# Altium PCB pcb.PcbDoc
Units mm, origin at the board's own origin, x right, y up, seen from the top; angles counter-clockwise.
Board outline 69.89 x 60 mm, 2 copper layers (Top Layer, Bottom Layer); 47 components, 49 nets, 205 pads, 70 vias.
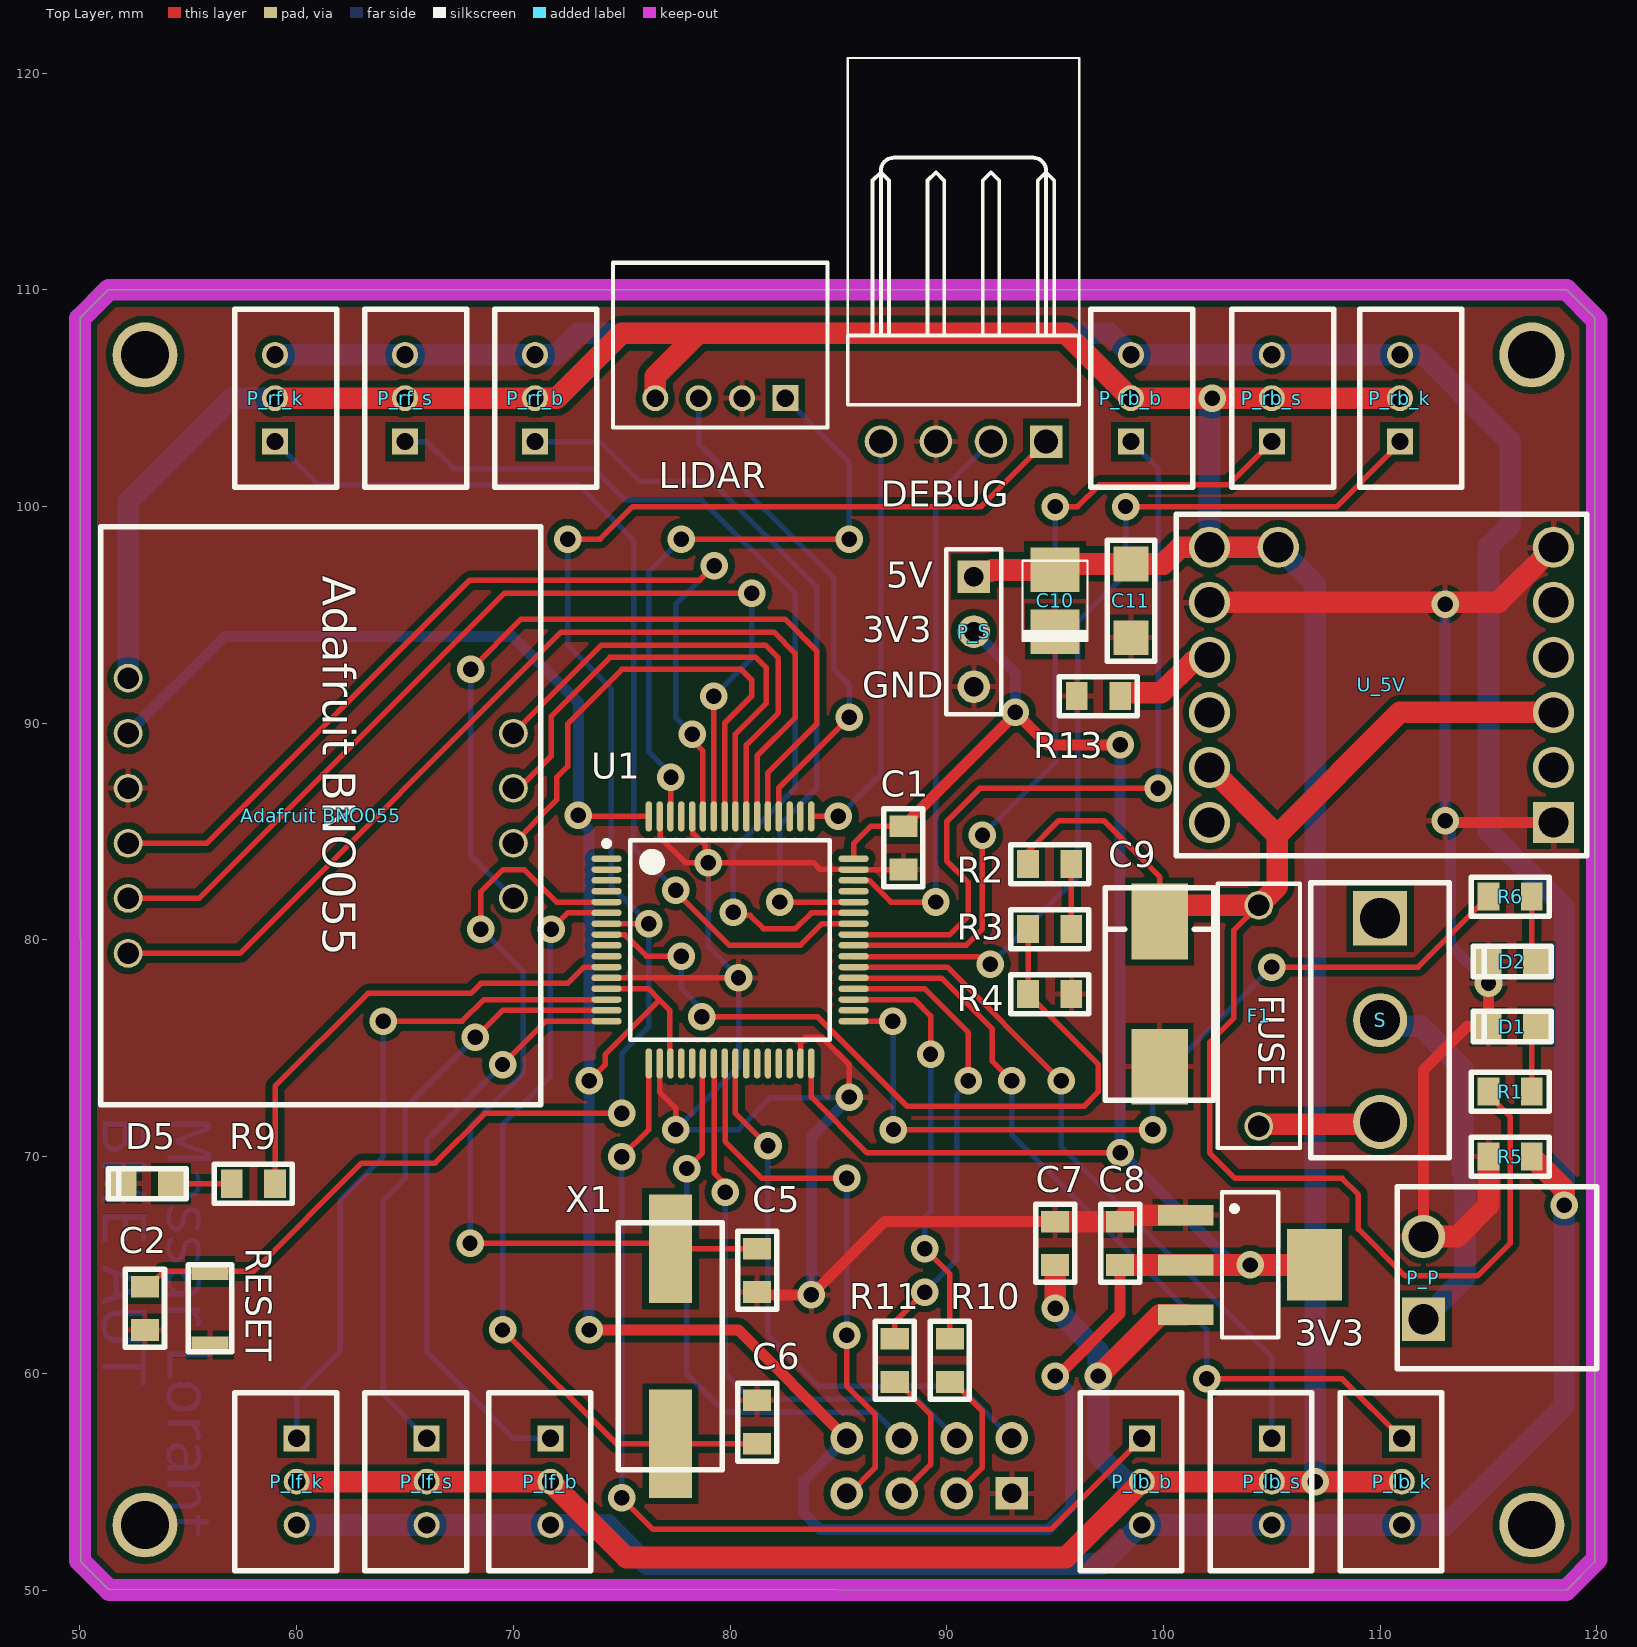
[diagram p0: Top Layer view]
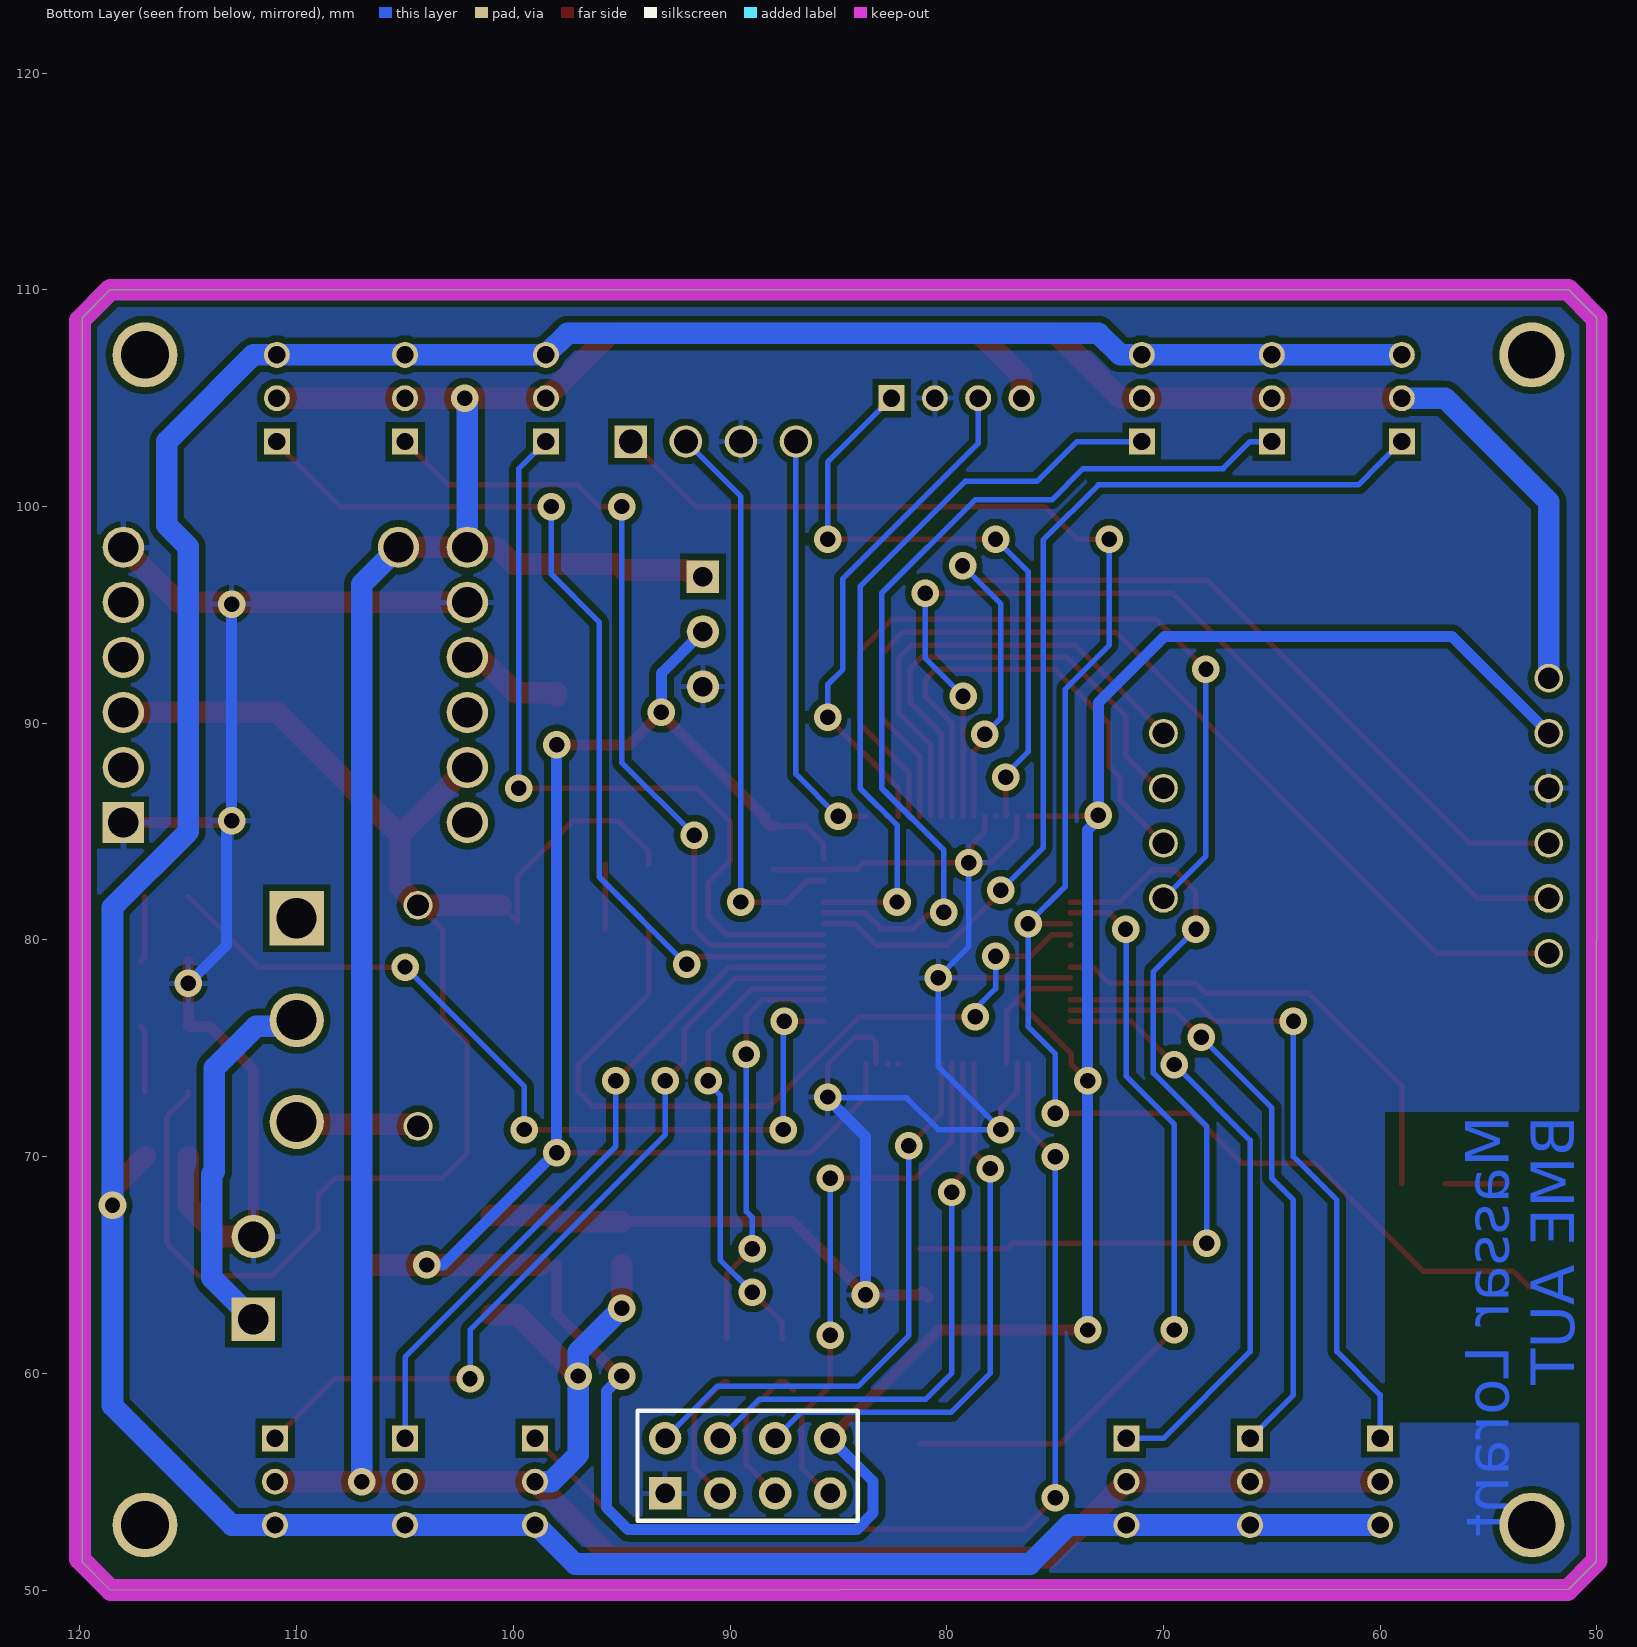
[diagram p1: Bottom Layer view, seen from below]

## Layer stack, top to bottom
Top Solder: solder mask 0.0102, Solder Resist, Dk 3.5
Top Layer: signal copper 0.0356
Dielectric 1: dielectric 0.32, FR-4, Dk 4.8
Bottom Layer: signal copper 0.0356
Bottom Solder: solder mask 0.0102, Solder Resist, Dk 3.5

## Board outline
50.028,51.307 51.297,50.038 118.609,50 119.897,51.288 119.897,108.712 118.609,110 51.297,110 50.009,108.712

## Design rules (kind name [scope] priority, off if disabled: settings)
Clearance [All] p1: gap=0.2 ignorepadtopadclearanceinfootprint=FALSE except(0: Arc-Hole Track-Hole SMDPad-Hole THPad-Hole Via-Hole Fill-Hole Poly-Hole Region-Hole Text-Hole; 0.3: Arc-Fill Arc-Poly Arc-Region Track-Fill Track-Poly Track-Region SMDPad-Fill SMDPad-Poly SMDPad-Region THPad-Fill THPad-Poly THPad-Region Via-Fill Via-Poly Via-Region Fill-Fill Fill-Poly Fill-Region Poly-Poly Poly-Region Region-Region)
PolygonConnect [All] p1: connectstyle=Relief reliefconductorwidth=0.254 reliefentries=4 polygonreliefangle="90 Angle" airgapwidth=0.254
RoutingVias [All] p1: holewidth=0.711 width=1.27 viastyle="Through Hole" minholewidth=0.711 minwidth=1.27 maxholewidth=0.711 maxwidth=1.27
SilkToSolderMaskClearance [IsPad] p1: minsilkscreentomaskgap=0.2 clearancetoexposedcopper=TRUE
SolderMaskExpansion [All] p1: expansion=0 istentingtop=FALSE
Width [All] p1: maxlimit=2 minlimit=0.254 preferedwidth=0.254
29 further rules are at their usual default settings.

## Classes and differential pairs
component class mcu: "Adafruit BNO055" C1 C2 C5 C6 DEBUG LIDAR PBA RESET U1 X1
component class motor: P_lb_b P_lb_k P_lb_s P_lf_b P_lf_k P_lf_s P_rb_b P_rb_k P_rb_s P_rf_b P_rf_k P_rf_s
component class power: 3V3 C7 C8 C9 C10 C11 D1 D2 F1 P_P P_S R1 R2 R3 R4 R5 R6 R13 S U_5V
component class wifi_sensor: D5 R9 R10 R11

## Components (designator, comment, footprint, x,y, rotation, side; value= is the part's Value field where it differs from the comment)
3V3 "LD1117S33V" FP_SOT223 104,65 r0 top (schematic designator U_3V3)
"Adafruit BNO055" "BNO055 Adafruit Board" "ADAFRUIT BNO055" 60.95,89.065 r270 top
C1 "100nF" FP_0805_CAP_085 88,84.25 r90 top
C2 "100nF" FP_0805_CAP_085 53,63 r90 top
C5 "18pF" FP_0805_CAP_085 81.25,64.75 r90 top
C6 "18pF" FP_0805_CAP_085 81.25,57.75 r270 top
C7 "10uF" FP_0805_CAP_085 95,66 r270 top
C8 "10uF" FP_0805_CAP_085 98,66 r270 top
C9 "330uF" FP_7343 99.825,77.5 r270 top
C10 "100uF" FP_3528 95,95.65 r90 top
C11 "220uF" FP_1206_CAP_125 98.5,95.65 r90 top
D1 "LED Blue" FP_0805_LED_RED 117.1,76 r180 top
D2 "LED Red" FP_0805_LED_RED 117.1,79 r180 top
D5 "LED Yellow" FP_0805_LED_RED 54.1,68.75 r180 top
DEBUG "Connector" FP_CONN4_TAP_254MM_90 94.58,103 r90 top (schematic designator PDB)
F1 "Fuse" MULTIFUSE 104.4,69.4 r90 top
LIDAR "Connector" FP_CONN4_LIDAR_2MM_90 79.55,107.45 r0 top (schematic designator PLIDAR)
P_lb_b "Conn_3P" 3P_CONN_2MM 99,57 r270 top
P_lb_k "Conn_3P" 3P_CONN_2MM 111,57 r270 top
P_lb_s "Conn_3P" 3P_CONN_2MM 105,57 r270 top
P_lf_b "Conn_3P" 3P_CONN_2MM 71.712,57 r270 top
P_lf_k "Conn_3P" 3P_CONN_2MM 60,57 r270 top
P_lf_s "Conn_3P" 3P_CONN_2MM 66,57 r270 top
P_P "Power_In" SORK.3.81MM 112,62.5 r90 top
P_rb_b "Conn_3P" 3P_CONN_2MM 98.5,103 r90 top
P_rb_k "Conn_3P" 3P_CONN_2MM 110.915,103 r90 top
P_rb_s "Conn_3P" 3P_CONN_2MM 105,103 r90 top
P_rf_b "Conn_3P" 3P_CONN_2MM 71,103 r90 top
P_rf_k "Conn_3P" 3P_CONN_2MM 59,103 r90 top
P_rf_s "Conn_3P" 3P_CONN_2MM 65,103 r90 top
P_S "Header 3" HDR1X3 91.25,96.765 r270 top
R1 "270R" FP_0805_RES 116,73 r180 top
R2 "20K" FP_0805_RES 94.75,83.5 r180 top
R3 "20K" FP_0805_RES 94.75,80.5 r0 top
R4 "20K" FP_0805_RES 94.75,77.5 r180 top
R5 "0R" FP_0805_RES 116,70 r0 top
R6 "82R" FP_0805_RES 116,82 r180 top
R9 "100R" FP_0805_RES 58,68.75 r0 top
R10 "1K" FP_0805_RES 90.148,60.6 r90 top
R11 "1K" FP_0805_RES 87.6,60.6 r90 top
R13 "160R" FP_0805_RES 97,91.25 r0 top
RESET "Button" BUTTON 56,63 r90 top (schematic designator B_RST)
S "Slider" SLIDE 110,76.3 r90 top
U1 "STM32L476RET6" STM32L476RET6 80,80 r0 top
U3 "ESP8266" HDR2X4 93,54.46 r180 bottom
U_5V "PTH08T231WAD" "5V SUPPLY" 118,85.42 r180 top
X1 "8MHz" OSC 77.25,61.25 r270 top

## Footprints (in the part's own frame and the unit in brackets; to place one, negate y for a bottom-side part, rotate by r counter-clockwise, add the part's x,y. Pads: shape width x height; smd on the part's side, far side on the other; paste and mask are expansions set on the pad)
3P_CONN_2MM [mm]
  rect 1.2x1.2 hole 0.8: 1(0,0)
  round 1.2 hole 0.8: 2(2,0) 3(4,0)
  silkscreen extent -2.1,-2.85 6.1,1.85
"5V SUPPLY" [mil]
  rect 75x75 hole 55: 1(0,0)
  round 75 hole 55: 2(0,-200) 3(0,-500) 4(500,-500) 5(625,-500) 6(625,-400) 7(625,-300) 8(625,-200) 9(625,-100) 10(625,0) ""(0,-100) ""(0,-300) ""(0,-400)
  silkscreen extent -60,-560 685,60
"ADAFRUIT BNO055" [mm]
  round 1.33 hole 1: 3vo(-0.475,-8.73) ADR(7.145,9.05) GND(2.065,-8.73) INT(4.605,9.05) PS0(-0.475,9.05) PS1(2.065,9.05) RST(9.685,-8.73) SCL(7.145,-8.73) SDA(4.605,-8.73) Vin(-3.015,-8.73)
  silkscreen extent -10,-10 16.67,10.32
BUTTON [mm]
  rect 0.8x1.7 smd: 1(-1.7,0) 2(1.7,0)
  silkscreen extent -2,-1 2,1
FP_0805_CAP_085 [mm] "0805 kapacitás YAGEO 0.85mm magas"
  rect 1x1.3 smd: 1(-1,0) 2(1,0)
  silkscreen extent -1.8,-0.9 1.8,0.9, body extent -1,-0.64 1.03,0.64, height 0.85
FP_0805_LED_RED [mm] "0805 méretû piros LED"
  rect 1.2x1.3 smd: A(-0.1,0) K(2.1,0)
  silkscreen extent -0.8,-0.7 2.8,0.7, body extent 0.01,-0.63 2.03,0.62, height 1.1
FP_0805_RES [mm] "0805 ellenállás"
  rect 1x1.3 smd: 1(-1,0) 2(1,0)
  silkscreen extent -1.8,-0.9 1.8,0.9, body extent -1,-0.62 1,0.63, height 0.62
FP_1206_CAP_125 [mm] "1206 kapacitás 1.25 mm"
  rect 1.6x1.6 smd: 1(-1.7,0) 2(1.7,0)
  silkscreen extent -2.8,-1.1 2.8,1.1, body extent -1.52,-0.79 1.58,0.79, height 1.25
FP_3528 [mm] "3528 TANTÁL SMD \"B\"-TOK"
  rect 2.05x2.25 smd: N(-1.425,0) P(1.425,0)
  silkscreen extent -1.85,-1.5 1.85,1.5, body extent -2.52,-1.5 2.48,1.5, height 2.11
FP_7343 [mm]
  rect 3.5x2.6 smd: N(3.35,0) P(-3.35,0)
  silkscreen extent -4.9,-2.5 4.9,2.5, body extent -4.49,-2.31 4.5,2.31, height 3.1
FP_CONN4_LIDAR_2MM_90 [mm] "fekvo 4 pólusú 2mm csatlakozó"
  rect 1.2x1.2 hole 0.8: 1(3,-2.45)
  round 1.2 hole 0.8: 2(1,-2.45) 3(-1,-2.45) 4(-3,-2.45)
  silkscreen extent -4.95,-3.8 4.95,3.8
FP_CONN4_TAP_254MM_90 [mm] "fekvõ két pólusú tápcsatlakozó 2.54mm"
  rect 1.5x1.5 hole 1.1: 1(0,0)
  round 1.5 hole 1.1: 2(0,2.54) 3(0,5.08) 4(0,7.62)
  silkscreen extent 1.7,-1.53 17.7,9.15, body extent -0.34,-1.3 13.48,8.86, height 5.8
FP_SOT223 [mm] "SOT223 package, 3 leads"
  rect 2.55x0.95 smd: 1(-2.975,2.3) 2(-2.975,0) 3(-2.975,-2.3)
  rect 2.55x3.3 smd: 2(2.975,0)
  silkscreen extent -1.3,-3.35 1.3,3.35, body extent -3.5,-3.25 3.5,3.25, height 1.65
HDR1X3 [mm] "Connector; Header; 3 Position"
  rect 1.5x1.5 hole 0.9: 1(0,0)
  round 1.5 hole 0.9: 2(2.54,0) 3(5.08,0)
  silkscreen extent -1.27,-1.27 6.35,1.27
HDR2X4 [mm] "Connector; Header; 4x2 Position"
  rect 1.5x1.5 hole 0.9: 1(0,0)
  round 1.5 hole 0.9: 2(0,2.54) 3(2.54,0) 4(2.54,2.54) 5(5.08,0) 6(5.08,2.54) 7(7.62,0) 8(7.62,2.54)
  silkscreen extent -1.27,-1.27 8.89,3.81
MULTIFUSE [mm] "POLYFUSE Through-Hole"
  round 1.33 hole 1: 1(2,0) 2(12.2,0)
  silkscreen extent 1,-1.9 13.2,1.9
OSC [mm]
  rect 5x2 smd: 1(-4.5,0) 2(4.5,0)
  silkscreen extent -5.7,-2.4 5.7,2.4, body extent -5.7,-2.4 5.7,2.4, height 4.4
SLIDE [mm]
  rect 2.5x2.5 hole 1.85: 1(4.7,0)
  round 2.5 hole 1.85: 2(0,0) 3(-4.7,0)
  silkscreen extent -6.35,-3.2 6.35,3.2
SORK.3.81MM [mm]
  rect 2x2 hole 1.4: 1(0,0)
  round 2 hole 1.4: 2(3.81,0)
  silkscreen extent -2.3,-8 6.11,1.2
STM32L476RET6 [mm] "TSQFP, 64-Leads, Body 10.00x10.00mm, Pitch 0.50mm, IPC Medium Density"
  oval 1.4x0.3 smd: 1(-5.7,3.75) 2(-5.7,3.25) 3(-5.7,2.75) 4(-5.7,2.25) 5(-5.7,1.75) 6(-5.7,1.25) 7(-5.7,0.75) 8(-5.7,0.25) 9(-5.7,-0.25) 10(-5.7,-0.75) 11(-5.7,-1.25) 12(-5.7,-1.75) 13(-5.7,-2.25) 14(-5.7,-2.75) 15(-5.7,-3.25) 16(-5.7,-3.75) 33(5.7,-3.75) 34(5.7,-3.25) 35(5.7,-2.75) 36(5.7,-2.25) 37(5.7,-1.75) 38(5.7,-1.25) 39(5.7,-0.75) 40(5.7,-0.25) 41(5.7,0.25) 42(5.7,0.75) 43(5.7,1.25) 44(5.7,1.75) 45(5.7,2.25) 46(5.7,2.75) 47(5.7,3.25) 48(5.7,3.75)
  oval 0.3x1.4 smd: 17(-3.75,-5.7) 18(-3.25,-5.7) 19(-2.75,-5.7) 20(-2.25,-5.7) 21(-1.75,-5.7) 22(-1.25,-5.7) 23(-0.75,-5.7) 24(-0.25,-5.7) 25(0.25,-5.7) 26(0.75,-5.7) 27(1.25,-5.7) 28(1.75,-5.7) 29(2.25,-5.7) 30(2.75,-5.7) 31(3.25,-5.7) 32(3.75,-5.7) 49(3.75,5.7) 50(3.25,5.7) 51(2.75,5.7) 52(2.25,5.7) 53(1.75,5.7) 54(1.25,5.7) 55(0.75,5.7) 56(0.25,5.7) 57(-0.25,5.7) 58(-0.75,5.7) 59(-1.25,5.7) 60(-1.75,5.7) 61(-2.25,5.7) 62(-2.75,5.7) 63(-3.25,5.7) 64(-3.75,5.7)
  silkscreen extent -5.82,-4.6 4.6,4.6, body extent -5,-5 5,5, height 1.6

## Part data
C1 C2: library part "CAP 100nF", "Capacitor", Tolerance=10%, Voltage=50V, Name="100nF 0805 10% 50V X7R 0805B104K500CT (WAL)", Reference=82-10-76, Supplier=Lomex
C5 C6: library part CAP, "Capacitor", Tolerance=5%, Voltage=50V, Name="18pF 0805 5% 50V NP0 CL21C180JBANNNC (SAM)", Reference=82-08-38, Supplier=Lomex
C7 C8: library part "CAP 10uF", "Capacitor", Tolerance=10%, Voltage=16V, Name="SMD Multilayer Ceramic Capacitor, 0805", Reference=2320856, Supplier=Farnell
C9: library part CAP_ELECT, "Polarized Capacitor", Tolerance=20%, Voltage=10V, Name="T491D337M010AT -  Surface Mount Tantalum Capacitor, 330 µF, 10 V, T491 Series, ± 20%, 2917 [7343 Metric]", Reference=2762172, Supplier=Farnell
C10: library part CAP_ELECT, "Polarized Capacitor", Tolerance=10%, Voltage=6.3V, Name="100uF ?B? 6.3V 10% TAJB107K006RNJ (AVX) 3528", Reference=92-01-45, Supplier=Lomex
C11: library part CAP, "Capacitor", Tolerance=20%, Voltage=6.3V, Name="GRM32ER60J227ME05L -  SMD Multilayer Ceramic Capacitor, 1210 [3225 Metric], 220 µF, 6.3 V, ± 20%, X5R, GRM Series", Reference=2671588, Supplier=Farnell
D1: "Blue LED", I_max=25mA, Name="2012 BLUE 465nm 170mcd FYLS-0805UBC (FYL) W.CLEAR 2.0x1.2x0.8mm 0805 130°", Reference=95-01-58, Supplier=Lomex, U_fw=3.3V, Wavelength=465nm
D2: "Red LED", I_max=30mA, Name="2012 RED 643nm 28mcd FYLS-0805HRC (FYL) W.CLEAR 2.0x1.2x0.8mm 0805 130°", Reference=95-00-19, Supplier=Lomex, U_fw=1.9V, Wavelength=643nm
D5: "Yellow LED", I_max=20mA, Name="2012 YELLOW 590nm 220mcd 0805UYC (FEM) 20mA W.CLEAR 2.0x1.2x0.68mm 0805 140°", Reference=95-03-84, Supplier=Lomex, U_fw=2.1V, Wavelength=590nm
DEBUG LIDAR: library part Connector_4pin, "4pin Connector", Name="TÁPCSATL. 2.54mm 4P APA 90° NCW254-04R (G-S) FORR.", Reference=43-09-96, Supplier=Lomex
P_S: "Header, 3-Pin", LatestRevisionDate=17-Jul-2002, LatestRevisionNote="Re-released for DXP Platform.", Publisher="Altium Limited"
R1: library part "RES 270R", "Resistor", Power=125mW, Tolerance=5%, Name="YAGEO (PHYCOMP)  RC0805JR-07270RL  SMD Chip Resistor, Thick Film, 270 ohm", Reference=9233938, Supplier=Farnell
R2 R3 R4 R13: library part RES, "Resistor", Power=0.125W, Tolerance=1%, Supplier=Lomex
  R2 R3 R4: Name="20K0 0805 1% CR-05FL7---20K 0.125W (VIK)", Reference=80-11-47
  R13: Name="160R 0805 1% RC0805FR-07160RL 0.125W (YAG)", Reference=80-01-97
R5: library part RES, "Resistor", Power=0.125W, Name="0R00 0805 CR-05JL7----0R 0.125W (VIK) Iav=2A", Reference=81-10-02, Supplier=Lomex
R6: library part "RES 82R", "Resistor", Power=125mW, Tolerance=5%, Name="MULTICOMP  MCMR08X820 JTL  SMD Chip Resistor, Ceramic, 82 ohm", Reference=2073848, Supplier=Farnell
R9: library part "RES 100R", "Resistor", Power=125mW, Tolerance=5%, Name="YAGEO (PHYCOMP)  RC0805JR-07100RL  SMD Chip Resistor, Thick Film, 100 ohm,", Reference=9233881, Supplier=Farnell
R10 R11: library part "RES 1K", "Resistor", Power=125mW, Tolerance=5%, Name="YAGEO (PHYCOMP)  RC0805JR-071KL  SMD Chip Resistor, Thick Film, 1 kohm", Reference=9234004, Supplier=Farnell
U1: Manufacturer=STMICROELECTRONICS, Component Type=IC, Manufacturer Part No=STM32L476RET6, Name="STM32L476RET6 -  ARM Microcontroller, Ultra Low Power, STM32 Family STM32L4 Series Microcontrollers, 32bit, 80 MHz", Reference=2494459, Supplier=Farnell
U_5V: library part 5V_SUPPLY, Name="PTH08T231WAD -  Non Isolated POL DC/DC Converter, 1 Output, 33 W, 5.5 V, 6 A, Adjustable, Through Hole", Reference=2383162, Supplier=Farnell
X1: library part Crystal, "Quarz Crystal", Name="QCS8.00000F18B23M -  Crystal, 8 MHz, SMD, 12.5mm x 4.6mm, 30 ppm, 18 pF, 20 ppm, QCS Series", Reference=2508478, Supplier=Farnell
3V3: Name="TS1117BCW-3.3 -  Fixed LDO Voltage Regulator, 0V to 12V, 1.3V Dropout, 3.3Vout, 800mAout, SOT-223-3", Reference=7208359, Supplier=Farnell
"Adafruit BNO055": Name="Adafruit BNO055", Reference=485-2472, Supplier="Mouser Electronics"
F1: Name=Lomex, Reference=44-03-11, Supplier=Lomex
P_lb_b P_lb_k P_lb_s P_lf_b P_lf_k P_lf_s P_rb_b P_rb_k P_rb_s P_rf_b P_rf_k P_rf_s: Name="TÁPCSATL. 2.00mm 3P APA 180° NCW200-03S (G-S) FORR.", Reference=43-16-04, Supplier=Lomex
P_P: Name="SORKAPOCS 2 P RM3.81 CSAPSORLÉC 90° TLPHC100R-02P (TLM) ZÁRT 10A 150V VDE", Reference=43-27-99, Supplier=Lomex
RESET: Name="TACT 2.5x 3 2P SPST B3U-1000P (OMR) 2.5x3x1.2mm SMD H=1.2mm 153g", Reference=45-09-96, Supplier=Lomex
S: Name="Kapcsoló: csúszó; Pozíció:2; SPDT; 2A/250VAC; 5A/28VDC; ON-ON", Reference=5MS1S102AM2QE, Supplier=TME

## Free pads (board coordinates)
  round 3 hole 2.2: 1(53,107) 2(117,107) 3(117,53) 4(53,53)

## Via types
v1: diameter 1.27, hole 0.711, Top Layer to Bottom Layer, 70 vias

## Nets (pads, with @x,y where several pads share a name; then routed paths per layer and width w, separated by ;. In a path a pad name is that pad's centre, name@x,y a point inside that pad or via, vN(x,y) a via of type N, cw(c..) or ccw(c..) an arc to the next point about the centre after c; other vN are vias at no path point)
3V3: 3V3.2 "Adafruit BNO055.3vo" C1.2 C8.2 P_S.2 U1.13 U1.19 U1.32 U1.48 U1.64 U3.8 | length 184.2
  Top Layer w0.254: v1(73,85.75) 73.05,85.7 U1.64 U1.64@76.2,85.75 ; v1(73.5,73.5) 74.25,74.25 74.25,74.727 76.75,77.227 ; U1.13 76.227,77.75 76.75,77.227 ; U1.19@77.227,74.323 77.227,76.75 76.75,77.227 ; U1.32 83.75,72.75 86.323,70.177 v1(98,70.177) ; U1.48@85.677,83.727 U1.48 85.7,84.45 86.5,85.25 C1.2
  Top Layer w0.508: v1(73.5,62) 80.38,62 U3.8 ; C1.2 88.15,85.25 88.396,85.496 88.396,85.646 93.168,90.418 v1(93.168,90.5) 94.668,89 v1(98,89) ; v1(95,59.875) 95.125,59.875 98,62.75 C8.2
  Top Layer w1: 98.75,65 101.025,65 v1(104,65) 3V3.2@106.975,65
  Bottom Layer w0.508: 52.22,89.54 56.68,94 69.95,94 73,90.95 v1(73,85.75) 73,85.571 73.5,85.071 v1(73.5,73.5) v1(73.5,62) ; U3.8 83.4,55.02 83.4,53.549 84.149,52.8 94.702,52.8 95.7,53.798 95.7,59.175 v1(95,59.875) ; P_S.2 93.168,92.307 v1(93.168,90.5) ; v1(98,89) v1(98,70.177) 98.073,70.177 103.25,65 v1(104,65)
5V: 3V3.3 "Adafruit BNO055.Vin" C7.2 C10.P C11.2 LIDAR.4 P_lb_b.2 P_lb_k.2 P_lb_s.2 P_lf_b.2 P_lf_k.2 P_lf_s.2 P_rb_b.2 P_rb_k.2 P_rb_s.2 P_rf_b.2 P_rf_k.2 P_rf_s.2 P_S.1 U_5V.4 U_5V.5 | length 211.7
  Top Layer w0.254: 80.25,107.977 80.25,108 ; C10.P@94.9,97.075 C10.P C10.P@95.275,97.35
  Top Layer w1: P_rf_k.2 P_rf_s.2 P_rf_b.2 72,105 75,108 78.536,108 ; P_lf_k.2 P_lf_s.2 P_lf_b.2 75.212,51.5 95.5,51.5 P_lb_b.2 P_lb_s.2 v1(107,55) P_lb_k.2 ; LIDAR.4 76.55,106.014 78.536,108 ; P_S.1 91.5,97.015 92.026,97.015 92.086,97.075 C10.P@94.9,97.075 ; v1(95,63) C7.2 ; C10.P@95.275,97.35 C11.2 100,97.35 100.77,98.12 U_5V.5 U_5V.4 ; v1(97,59.875) 99.825,62.7 3V3.3 ; P_rb_k.2 P_rb_s.2 v1(102.25,105) P_rb_b.2 95.5,108 80.25,108 78.536,108
  Bottom Layer w1: 52.22,92.08 52.22,100.22 57,105 P_rf_k.2 ; v1(95,63) 97,61 v1(97,59.875) 97,56.25 98.25,55 P_lb_b.2 ; U_5V.5 102.125,104.875 v1(102.25,105) ; U_5V.4 107,96.42 v1(107,55)
7V4: C9.P F1.2 R1.2 R2.2 U_5V.2 U_5V.9 | length 75.9
  Top Layer w0.254: R2.2 93.75,84.085 95.165,85.5 97.25,85.5 99.825,82.925 C9.P C9.P@100.575,81.6 ; F1.2 103.25,80.45 103.25,76.394 102.125,75.269 102.125,70.177 103.302,69 108.25,69 109,68.25 109,66.65 111.15,64.5 114.5,64.5 116,66 116,71.85 115,72.85 R1.2
  Top Layer w1: C9.P@100.575,81.6 F1.2 105.25,82.45 105.25,84.835 ; U_5V.9 105.25,84.835 ; U_5V.2 110.915,90.5 105.25,84.835
GND: 3V3.1 "Adafruit BNO055.GND" C1.1 C2.1 C5.1 C6.1 C7.1 C8.1 C9.N C10.N C11.1 D1.K D2.K D5.K DEBUG.3 LIDAR.2 P_P.2 P_S.3 R4.1 R5.1 R13.1 RESET.1 U1.12 U1.18 U1.31 U1.47 U1.60 U1.63 U3.1 U_5V.1 U_5V.3 U_5V.6 | length 145.3
  Top Layer w0.254: U1.12 v1(80.39,78.25) ; U1.18 76.75,72.977 77.5,72.227 v1(77.5,71.25) ; U1.63 76.773,85.677 76.773,84.735 77.942,83.566 v1(78.994,83.566) ; U1.60 78.25,85.138 78.273,85.115 78.273,84.952 78.552,84.673 78.862,84.363 78.862,83.698 v1(78.994,83.566) ; U1.31 83.273,74.323 83.273,75.273 83.5,75.5 84.25,75.5 85.5,74.25 v1(85.5,72.75) ; C1.1 85.138,83.25 85.115,83.273 84.139,83.273 83.846,83.566 v1(78.994,83.566)
  Top Layer w0.508: C5.1@80.854,63.504 81.1,63.75 81.125,63.75 81.25,63.625 v1(83.75,63.625) 87.125,67 C7.1 ; P_P.2 112,74 114,76 D1.K D2.K ; v1(113,85.5) 113.08,85.42 U_5V.1 ; v1@115,77.75 v1(115,78)
  Top Layer w1: C7.1 C8.1 98.3,67.3 3V3.1 ; U_5V.6 115.46,95.58 U_5V.3 ; P_P.2 113.56,66.31 115,67.75 R5.1
  Bottom Layer w0.254: v1(78.994,83.566) 78.994,79.684 80.39,78.288 v1(80.39,78.25) 80.39,74.14 v1(77.5,71.25) 80.39,71.25 81.852,72.712 85.462,72.712 v1(85.5,72.75)
  Bottom Layer w0.508: v1(83.75,63.625) 83.75,70.927 85.5,72.677 v1(85.5,72.75) ; v1(113,95.5) v1(113,85.5) 113.25,85.25 113.25,79.75 v1(115,78)
GNDM: P_lb_b.3 P_lb_k.3 P_lb_s.3 P_lf_b.3 P_lf_k.3 P_lf_s.3 P_rb_b.3 P_rb_k.3 P_rb_s.3 P_rf_b.3 P_rf_k.3 P_rf_s.3 R5.2 | length 171
  Top Layer w1: R5.2 118.5,68.5 v1(118.5,67.75)
  Bottom Layer w1: P_rf_k.3 P_rf_s.3 P_rf_b.3 72,107 73,108 97.5,108 P_rb_b.3 P_rb_s.3 P_rb_k.3 112,107 115.45,103.55 116,103 116,99.137 115,98.137 115,85 118.5,81.5 v1(118.5,67.75) 118.5,58.5 113,53 P_lb_k.3 P_lb_s.3 98.946,53 97.146,51.2 76.162,51.2 74.362,53 P_lf_b.3 P_lf_s.3 P_lf_k.3
M_SCTR: LIDAR.1 U1.62 | length 29.3
  Top Layer w0.254: U1.62 77.25,85.89 77.271,85.911 77.273,85.911 v1(77.273,87.5) ; v1(77.75,98.5) v1(85.5,98.5)
  Bottom Layer w0.254: v1(77.273,87.5) 77.273,87.657 76.25,88.68 76.25,97 v1(77.75,98.5) ; LIDAR.1 85.5,102.05 v1(85.5,98.5)
"NetAdafruit BNO055_1": "Adafruit BNO055.ADR" U1.53 | length 37.5
  Top Layer w0.254: v1(68.038,92.484) 70.354,94.8 82.527,94.8 84,93.327 84,89.975 81.75,87.725 U1.53
  Bottom Layer w0.254: v1(68.038,92.484) 68.038,83.882 70,81.92
"NetAdafruit BNO055_2": "Adafruit BNO055.INT" U1.57 | length 23.1
  Top Layer w0.254: 70,84.46 72,86.46 72,87.5 72.5,88 72.5,89.975 75.009,92.484 80.516,92.484 81,92 81,91.25 79.75,90 U1.57
"NetAdafruit BNO055_3": "Adafruit BNO055.PS1" U1.56 | length 22.9
  Top Layer w0.254: 70,87 70.25,87 71.75,88.5 71.75,90.332 74.458,93.04 81.187,93.04 81.677,92.55 81.677,90.927 80.25,89.5 U1.56
"NetAdafruit BNO055_4": "Adafruit BNO055.PS0" U1.55 | length 22.1
  Top Layer w0.254: 70,89.54 74.06,93.6 81.627,93.6 82.227,93 82.227,90.477 80.75,89 U1.55
"NetAdafruit BNO055_8": "Adafruit BNO055.SDA" U1.59 | length 45.2
  Top Layer w0.254: 52.22,84.46 55.846,84.46 67.986,96.6 78.6,96.6 v1(79.273,97.273) ; v1(78.25,89.5) 78.25,89.225 78.75,88.725 U1.59
  Bottom Layer w0.254: v1(78.25,89.5) 77.5,90.25 77.5,95.5 v1(79.273,97.273)
"NetAdafruit BNO055_9": "Adafruit BNO055.SCL" U1.58 | length 45.6
  Top Layer w0.254: 52.22,81.92 55.5,81.92 69.58,96 v1(81,96) ; U1.58 v1(79.25,91.25)
  Bottom Layer w0.254: v1(79.25,91.25) 81,93 v1(81,96)
"NetAdafruit BNO055_10": "Adafruit BNO055.RST" U1.54 | length 45.6
  Top Layer w0.254: 52.22,79.38 57.38,79.38 72.2,94.2 82.027,94.2 83,93.227 83,90.25 81.25,88.5 U1.54
NetB_RST_2: C2.2 DEBUG.1 RESET.2 U1.7 | length 79.8
  Top Layer w0.254: C2.2 53.15,64 53.85,64.7 RESET.2 58,64.7 63,69.7 66.386,69.7 68.686,72 v1(75,72) ; v1(72.5,98.5) 74,98.5 75.5,100 91.58,100 DEBUG.1 ; U1.7 v1(76.25,80.75)
  Bottom Layer w0.254: v1(72.5,98.5) 72.5,93.6 74.523,91.577 74.523,82.477 v1(76.25,80.75) 76.25,76 75,74.75 v1(75,72)
NetC5_2: C5.2 U1.5 X1.1 | length 38.3
  Top Layer w0.254: v1(68,66) 77,66 X1.1 C5.2 ; v1(68.5,80.5) 68.5,82.227 69.523,83.25 70.5,83.25 72,81.75 U1.5
  Bottom Layer w0.254: v1(68,66) 68,71.39 70.462,73.851 70.462,78.538 v1(68.5,80.5)
NetC6_2: C6.2 U1.6 X1.2 | length 36.2
  Top Layer w0.254: v1(69.5,62) 74.75,56.75 76.25,56.75 X1.2 C6.2 ; v1(71.75,80.5) 72.5,81.25 U1.6
  Bottom Layer w0.254: v1(69.5,62) 69.5,71.492 71.712,73.704 71.712,80.462 v1(71.75,80.5)
NetD1_1: D1.A R1.1 | length 3.1
  Top Layer w0.254: R1.1 117,75.8 D1.A
NetD2_1: D2.A R6.1 | length 3.1
  Top Layer w0.254: R6.1 117,79.2 D2.A
NetD5_1: D5.A R9.1 | length 2.8
  Top Layer w0.254: D5.A R9.1
NetF1_1: F1.1 S.3 | length 5.7
  Top Layer w0.254: F1.1 F1.1@104.5,71.5 ; S.3@109.9,71.5 S.3
  Top Layer w1: F1.1@104.5,71.5 S.3@109.9,71.5
NetP_lb_b_1: P_lb_b.1 U1.17 | length 46.9
  Top Layer w0.254: v1(75,54.25) 76.45,52.8 94.8,52.8 P_lb_b.1 ; v1(75,70) 76.25,71.25 U1.17
  Bottom Layer w0.254: v1(75,54.25) v1(75,70)
NetP_lb_k_1: P_lb_k.1 U1.37 | length 37.8
  Top Layer w0.254: U1.37 85.723,78.227 89.773,78.227 92.106,75.894 92.106,74.394 v1(93,73.5) ; v1(102,59.75) 108.25,59.75 P_lb_k.1
  Bottom Layer w0.254: v1(93,73.5) 93,71 102,62 v1(102,59.75)
NetP_lb_s_1: P_lb_s.1 U1.38 | length 32.3
  Top Layer w0.254: U1.38 90.025,78.75 v1(95.275,73.5)
  Bottom Layer w0.254: v1(95.275,73.5) 95.275,70.475 105,60.75 P_lb_s.1
NetP_lf_b_1: P_lf_b.1 U1.16 | length 27.7
  Top Layer w0.254: v1(69.5,74.25) 71.5,76.25 U1.16
  Bottom Layer w0.254: v1(69.5,74.25) 66,70.75 66,61 70,57 P_lf_b.1
NetP_lf_k_1: P_lf_k.1 U1.14 | length 31.6
  Top Layer w0.254: v1(64,76.25) 67.64,76.25 68.64,77.25 U1.14
  Bottom Layer w0.254: P_lf_k.1 60,59 62,61 62,68 64,70 v1(64,76.25)
NetP_lf_s_1: P_lf_s.1 U1.15 | length 27.7
  Top Layer w0.254: v1(68.25,75.5) 69.5,76.75 U1.15
  Bottom Layer w0.254: P_lf_s.1 64,59 64,68 65,69 65,72.25 v1(68.25,75.5)
NetP_P_1: P_P.1 S.2 | length 17.1
  Bottom Layer w1: S.2 110.287,76.013 111.875,76.013 113.8,74.088 113.8,69.308 113.914,69.194 113.914,64.414 P_P.1
NetP_rb_b_1: P_rb_b.1 U1.41 | length 37.3
  Top Layer w0.254: U1.41 90.148,80.25 91,81.102 91,82.648 90,83.648 90,85.46 91.54,87 v1(99.75,87)
  Bottom Layer w0.254: P_rb_b.1 99.75,101.75 v1(99.75,87)
NetP_rb_k_1: P_rb_k.1 U1.39 | length 44.1
  Top Layer w0.254: U1.39 85.723,79.227 91.648,79.227 v1(92,78.875) ; v1(98.25,100) 108,100 110.442,102.442 110.442,102.527 P_rb_k.1
  Bottom Layer w0.254: v1(92,78.875) 96.04,82.915 96.04,94.665 98.25,96.875 v1(98.25,100)
NetP_rb_s_1: P_rb_s.1 U1.40 | length 38.4
  Top Layer w0.254: U1.40 90.898,79.75 91.648,80.5 v1(91.648,84.835) ; v1(95,100) 96.038,100 97.038,101 103,101 P_rb_s.1
  Bottom Layer w0.254: v1(91.648,84.835) 95,88.187 v1(95,100)
NetP_rf_b_1: P_rf_b.1 U1.44 | length 34.4
  Top Layer w0.254: v1(82.296,81.75) U1.44
  Bottom Layer w0.254: P_rf_b.1 74,103 75.841,101.159 79.154,101.159 84,96.313 84,87 82.296,85.296 v1(82.296,81.75)
NetP_rf_k_1: P_rf_k.1 U1.42 | length 45.1
  Top Layer w0.254: v1(77.5,82.296) 77.5,82.214 79.958,79.756 83.256,79.756 84.25,80.75 U1.42
  Bottom Layer w0.254: P_rf_k.1 60,102 61,101 73,101 75.55,98.45 75.55,84.246 v1(77.5,82.296)
NetP_rf_s_1: P_rf_s.1 U1.43 | length 43
  Top Layer w0.254: v1(80.14,81.28) 80.288,81.132 80.92,81.132 81.534,80.518 83.018,80.518 83.75,81.25 U1.43
  Bottom Layer w0.254: P_rf_s.1 66,103 67.25,101.75 73.708,101.75 75.146,100.312 78.688,100.312 83,96 83,87 80.14,84.14 v1(80.14,81.28)
NetPDB_2: DEBUG.2 U1.46 | length 26.5
  Top Layer w0.254: U1.46 85.723,82.727 86.448,82.727 87.425,81.75 v1(89.5,81.75)
  Bottom Layer w0.254: v1(89.5,81.75) 89.5,100.46 DEBUG.2
NetPDB_4: DEBUG.4 U1.49 | length 19.4
  Top Layer w0.254: U1.49 v1(85,85.7)
  Bottom Layer w0.254: v1(85,85.7) 85.01,85.7 86.96,87.65 DEBUG.4
NetR2_1: R2.1 R3.2 | length 3
  Top Layer w0.254: R3.2 R2.1
NetR3_1: R3.1 R4.2 U1.8 | length 36.2
  Top Layer w0.254: U1.8 75.14,80.25 76.14,79.25 v1(77.75,79.25) ; v1(78.688,76.454) 84.046,76.454 88.175,72.325 96.325,72.325 97,73 97,74.25 R4.2 R3.1
  Bottom Layer w0.254: v1(77.75,79.25) 77.75,77.75 78.688,76.813 v1(78.688,76.454)
NetR6_2: R6.2 U1.33 | length 39.9
  Top Layer w0.254: U1.33 v1(87.5,76.25) ; v1(87.54,71.25) v1(99.5,71.25) ; v1(105,78.75) 111.75,78.75 R6.2
  Bottom Layer w0.254: v1(87.5,76.25) 87.54,76.21 v1(87.54,71.25) ; v1(99.5,71.25) 99.5,73.25 v1(105,78.75)
NetR9_2: R9.2 U1.11 | length 22.1
  Top Layer w0.254: R9.2 59,73.25 63.288,77.538 68.038,77.538 68.5,78 72.5,78 73.25,78.75 U1.11
NetR10_1: R10.1 U3.3 | length 6.3
  Top Layer w0.254: R10.1 90.298,59.6 91.648,58.25 91.648,55.648 U3.3
NetR10_2: R10.2 U1.35 | length 19.4
  Top Layer w0.254: U1.35 88.5,77.25 89.25,76.5 v1(89.25,74.727) ; v1(88.977,65.75) 90.148,64.579 R10.2
  Bottom Layer w0.254: v1(88.977,65.75) 88.977,67.187 89.25,67.46 v1(89.25,74.727)
NetR11_1: R11.1 U3.5 | length 7.1
  Top Layer w0.254: R11.1@87.077,59.227 87.45,59.6 R11.1 87.75,59.6 89.25,58.1 89.25,55.79 U3.5
NetR11_2: R11.2 U1.36 | length 21.7
  Top Layer w0.254: U1.36 88.977,77.75 91,75.727 v1(91,73.5) ; R11.2 87.6,62.373 v1(88.977,63.75)
  Bottom Layer w0.254: v1(88.977,63.75) 90.46,65.233 90.46,72.843 91,73.383 v1(91,73.5)
NetR13_2: R13.2 U_5V.7 | length 5
  Top Layer w1: R13.2 98,91.4 99.9,91.4 101.367,92.867 101.952,92.867 U_5V.7
NetU1_22: U1.22 U3.6 | length 25.8
  Top Layer w0.254: v1(78,69.45) 78.727,70.177 78.727,74.277 U1.22
  Bottom Layer w0.254: v1(78,69.45) 78,60 79.8,58.2 86.72,58.2 U3.6
NetU1_23: U1.23 U3.4 | length 26.4
  Top Layer w0.254: U1.23 79.273,74.277 79.273,69.227 79.773,68.727 v1(79.773,68.364)
  Bottom Layer w0.254: v1(79.773,68.364) 79.773,60 80.973,58.8 88.66,58.8 U3.4
NetU1_24: U1.24 U3.7 | length 25.6
  Top Layer w0.254: U1.24 79.773,74.277 79.773,70.703 81.476,69 v1(85.38,69) ; U3.7 85.512,54.46 86.7,55.648 86.7,58.1 85.38,59.42 v1(85.38,61.75)
  Bottom Layer w0.254: v1(85.38,61.75) v1(85.38,69)
NetU1_25: U1.25 U3.2 | length 26.4
  Top Layer w0.254: U1.25 80.25,72 v1(81.75,70.5)
  Bottom Layer w0.254: v1(81.75,70.5) 81.75,61.75 84.1,59.4 90.6,59.4 U3.2
Tx: LIDAR.3 U1.52 | length 23.5
  Top Layer w0.254: U1.52 82.25,87.023 v1(85.5,90.273)
  Bottom Layer w0.254: LIDAR.3 78.55,102.91 84.79,96.67 84.79,92.487 85.5,91.777 v1(85.5,90.273)
pads on no net: S.1 U1.1 U1.2 U1.3 U1.4 U1.9 U1.10 U1.20 U1.21 U1.26 U1.27 U1.28 U1.29 U1.30 U1.34 U1.45 U1.50 U1.51 U1.61 U_5V. U_5V.8 U_5V.10
copper on no net: | length 0.2
  Top Layer w0.254: 74.277,79.773 74.3,79.75 ; 77.727,85.723 77.75,85.7 ; 82.25,74.254 82.227,74.277 82.25,74.3 ; 82.727,74.277 82.75,74.3 ; 82.75,85.7 82.773,85.723

## Polygon pours and split planes (outlines as drawn)
GND on Top Layer "Top Layer-GND" (solid, remove dead copper, pour order 6): 50,110 50,50 120,50 120,110
GND on Bottom Layer "Bottom Layer-GND" (solid, remove dead copper, pour order 10): 50,110 120,110 120,50 50,50

## Keep-outs
Keep-Out Layer:
  lines w1: 50,51.346 50,108.674 51.326,110 118.6,110 120,108.6 120,51.42 118.58,50 51.346,50 50,51.346

## Other copper
Bottom Layer:
  text "Massar Lorant / BME AUT" at 51.054,71.882 h2 r270

## Silkscreen, mask and mechanical layers (free items; w line width, h text height)
Top Overlay:
  text "5V" at 87.214,96.254 h1.2
  text "3V3" at 86.106,93.726 h1.2
  text "GND" at 86.106,91.186 h1.2
Mechanical 1:
  lines w0.5: 50,51.346 51.346,50 118.58,50 120,51.42 120,108.6 118.6,110 51.326,110 50,108.674 50,51.346

## Text inside footprints (layer, text, board x,y; h text height)
F1: Top Overlay "FUSE" at 104.4,77.47 h1.2 r270